# EAGLE board sensor tom de luz (EAGLE 9.7.0)

Size 124.97 x 119.9 mm. Coordinates in mm from the lower left corner, seen from the top.
Outline: 0,0 124.97,0 124.97,119.9 0,119.9 0,0
Copper layers (1*16): Top 0.035mm / dielectric 1.5mm / Bottom 0.035mm
Design rules "default": minimum track width 6mil, minimum drill 0.35mm, track to track 6mil, track to pad 6mil, pad to pad 6mil, via to via 6mil, smd to smd 6mil, copper to edge 40mil, drill to drill 6mil, minimum pad ring 10mil, minimum via ring 8mil, stop-mask expansion 4mil, vias tented up to drill 0mil, thermal gap 10mil

## Footprints (pad centres in the part's own frame; a part is rotated, then mirrored left to right if it is on the bottom)
LEDRD254W60D565H860B_Y = drill 0.981 pad 1.581: 1 -1.27,0; 2 1.27,0
LED-RGB-5MM = drill 0.9: B 0.635,0.635; C -0.635,-0.635; G 1.905,-0.635; R -1.905,0.635
LEDRD254W60D565H860B = drill 0.981 pad 1.581: 1 -1.27,0; 2 1.27,0
LEDRD254W60D565H860B_G = drill 0.981 pad 1.581: 1 -1.27,0; 2 1.27,0
PIEZO = drill 1 pad 1.6: 1 -3.5,0; 2 3.5,0
RESAD1016W63L850D250B = drill 0.83 pad 1.43: 1 -5.08,0; 2 5.08,0
GL5528 = drill 0.8 pad 1.4: 1 -1.702,0; 2 1.702,0
ARDUINO-UNO-R3-SHIELD = drill 1.016 pad 1.88: 3.3V 24.13,-2.54; 5V 24.13,0; A0 24.13,12.7; A1 24.13,15.24; A2 24.13,17.78; A3 24.13,20.32; A4 24.13,22.86; A5 24.13,25.4; AREF -24.13,-13.97; D2 -24.13,20.32; D3 -24.13,17.78; D4 -24.13,15.24; D5 -24.13,12.7; D6 -24.13,10.16; D7 -24.13,7.62; D8 -24.13,3.81; D9 -24.13,1.27; D10 -24.13,-1.27; D11 -24.13,-3.81; D12 -24.13,-6.35; D13 -24.13,-8.89; GND@0 24.13,2.54; GND@1 24.13,5.08; GND@2 -24.13,-11.43; IOREF 24.13,-7.62; NC 24.13,-10.16; RES 24.13,-5.08; RX -24.13,25.4; SCL -24.13,-19.05; SDA -24.13,-16.51; TX -24.13,22.86; VIN 24.13,7.62
TO92 = drill 0.813 octagon: 1 -1.27,0; 2 0,1.905; 3 1.27,0

## Placement (x,y rotation side)
D1  YELLOW  [LEDRD254W60D565H860B_Y]  50.44,109.86 0 top
D2  LED-RGBRCBG-PTH  [LED-RGB-5MM]  68.22,112.4 0 top
D4  RED  [LEDRD254W60D565H860B]  35.2,109.86 0 top
D5  RED  [LEDRD254W60D565H860B]  58.06,109.86 0 top
D7  GREEN  [LEDRD254W60D565H860B_G]  42.82,109.86 0 top
D8  YELLOW  [LEDRD254W60D565H860B_Y]  27.58,109.86 0 top
D9  GREEN  [LEDRD254W60D565H860B_G]  19.96,109.86 0 top
PIEZO1  PIEZO  [PIEZO]  111.39,75.58 90 top
R1  220  [RESAD1016W63L850D250B]  18.69,102.24 90 top
R2  PHOTOCELL_GL5528  [GL5528]  88.54,112.4 0 top
R3  220  [RESAD1016W63L850D250B]  26.31,102.24 90 top
R4  220  [RESAD1016W63L850D250B]  41.55,102.24 90 top
R5  220  [RESAD1016W63L850D250B]  49.17,102.24 90 top
R6  220  [RESAD1016W63L850D250B]  56.79,102.24 90 top
R7  1k  [RESAD1016W63L850D250B]  69.49,102.24 90 top
R8  220  [RESAD1016W63L850D250B]  33.93,102.24 90 top
R9  1k  [RESAD1016W63L850D250B]  89.81,102.24 90 top
U1  ARDUINO-UNO-R3-SHIELD  [ARDUINO-UNO-R3-SHIELD]  47.88,29.84 270 top
U2  TMP36GT9Z_TO92  [TO92]  79.65,112.4 0 top

## Library data of the parts
D1 D8 = Tinkercad; CATEGORY: Opto-Electronic; SUB-CATEGORY: LED; VALUE: LED_YELLOW
D2 PIEZO1 R1-R9 U1 U2 = Tinkercad
D4 D5 = Tinkercad; CATEGORY: Opto-Electronic; SUB-CATEGORY: LED; VALUE: LED_RED
D7 D9 = Tinkercad; CATEGORY: Opto-Electronic; SUB-CATEGORY: LED; VALUE: LED_GREEN

## Nets
D1_A: D1.1 R5.2
D2_B: D2.B R7.2
D4_A: D4.1 R8.2
D5_A: D5.1 R6.2
D7_A: D7.1 R4.2
D8_A: D8.1 R3.2
D9_A: D9.1 R1.2
U1_5V: R2.1 U1.5V U2.3
U1_A0: R2.2 R9.2 U1.A0
U1_A1: U1.A1 U2.2
U1_D2: PIEZO1.1 U1.D2
U1_D5: R1.1 U1.D5
U1_D6: R3.1 U1.D6
U1_D7: R8.1 U1.D7
U1_D8: R4.1 U1.D8
U1_D9: R5.1 U1.D9
U1_D10: R6.1 U1.D10
U1_D12: R7.1 U1.D12
U1_GND: D1.2 D2.C D4.2 D5.2 D7.2 D8.2 D9.2 PIEZO1.2 R9.1 U1.GND@0 U1.GND@1 U1.GND@2 U2.1

## Tracks (layer width: path | path; a pad name or v marks a point on that pad's centre or on a via)
D1_A  (1 unrouted)
D2_B  (1 unrouted)
D4_A  (1 unrouted)
D5_A  (1 unrouted)
D7_A  (1 unrouted)
D8_A  (1 unrouted)
D9_A  (1 unrouted)
U1_5V  (2 unrouted)
U1_A0  (2 unrouted)
U1_A1  (1 unrouted)
U1_D2  (1 unrouted)
U1_D5  (1 unrouted)
U1_D6  (1 unrouted)
U1_D7  (1 unrouted)
U1_D8  (1 unrouted)
U1_D9  (1 unrouted)
U1_D10  (1 unrouted)
U1_D12  (1 unrouted)
U1_GND  (12 unrouted)